# EAGLE board ArmBoardNew-New_Main_Board (EAGLE 8.6.0)
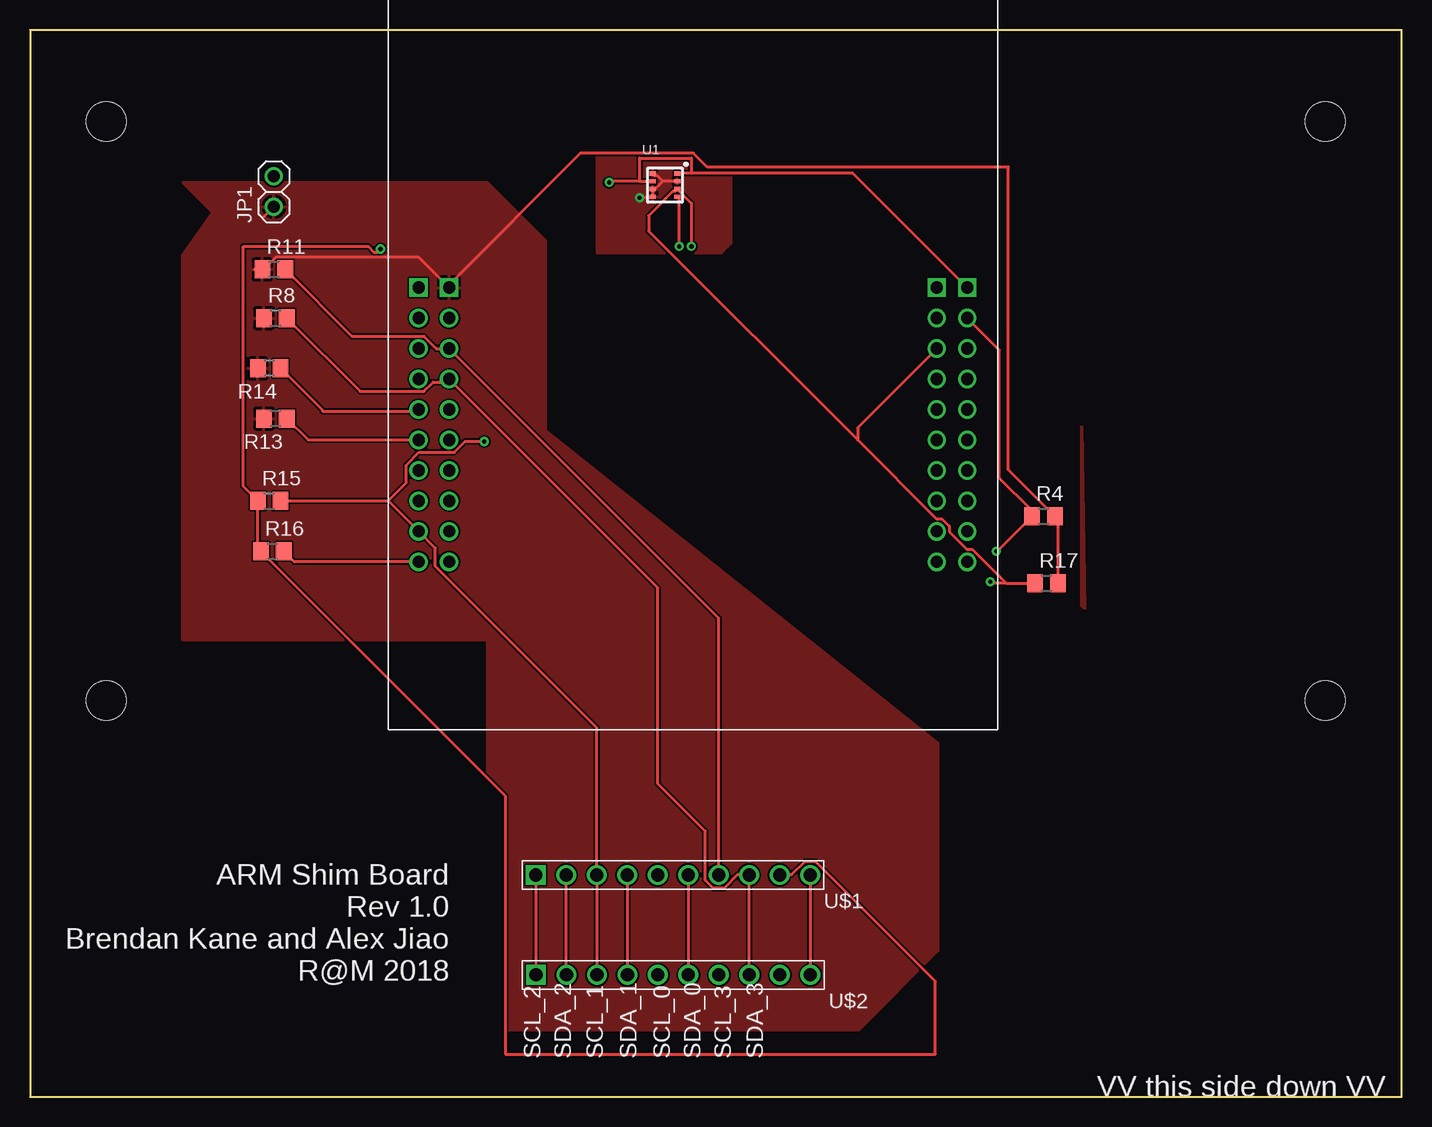
[diagram p0: board, top side]
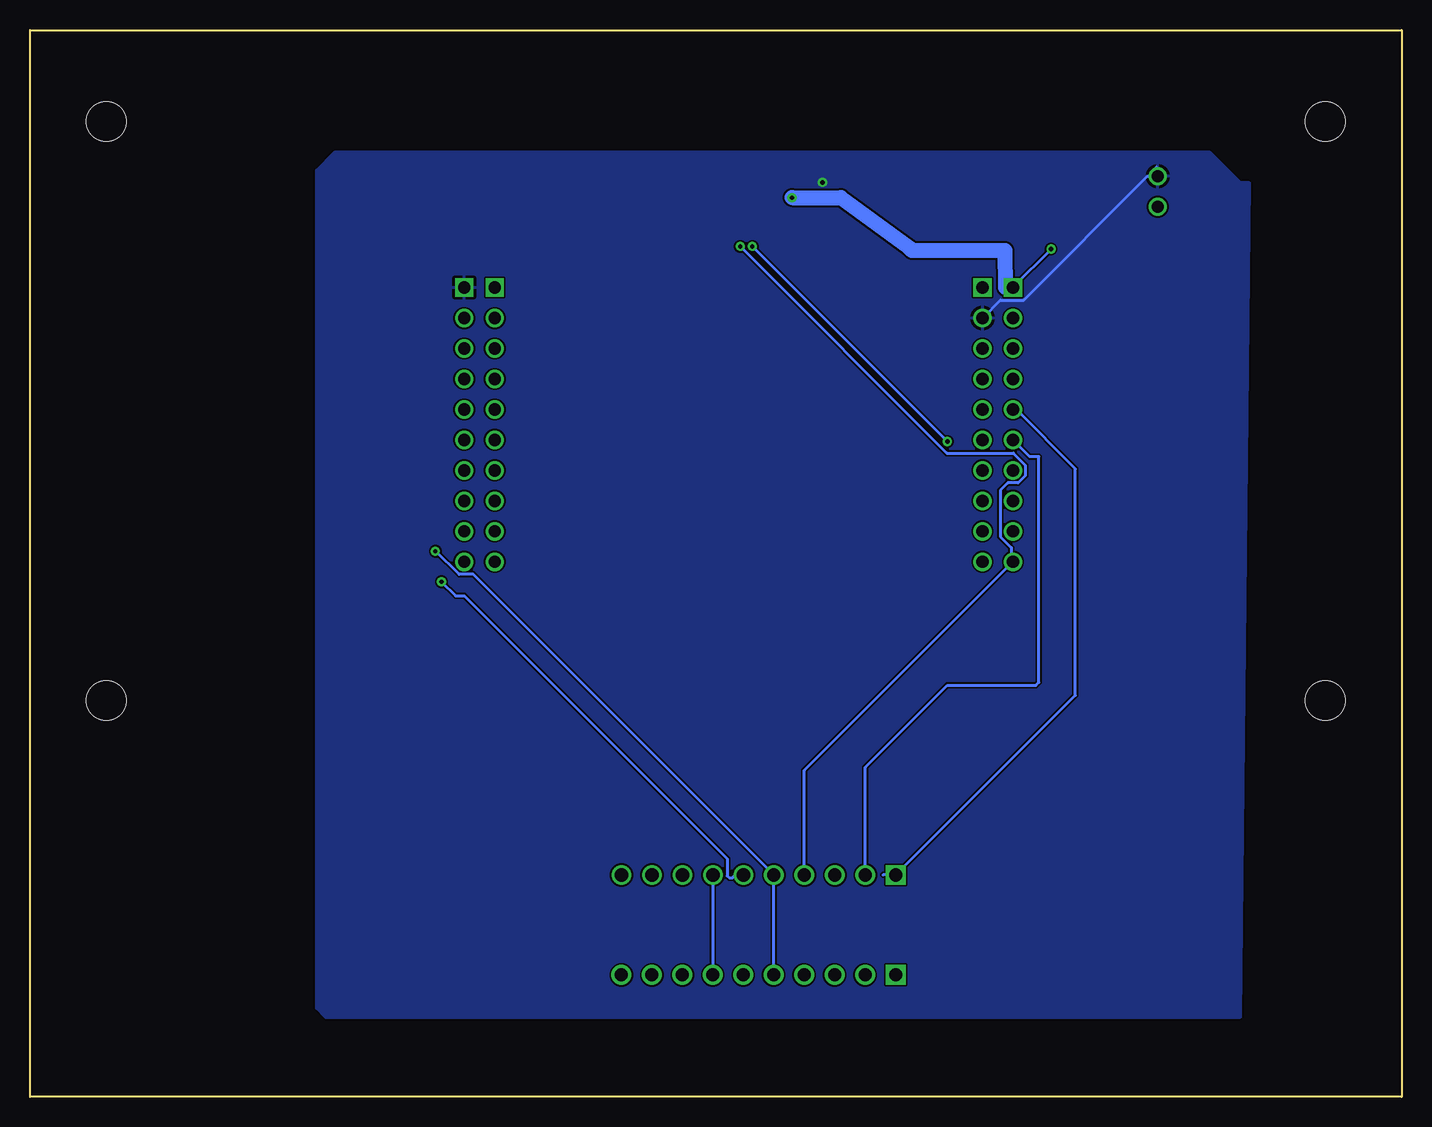
[diagram p1: board, bottom side, seen from below]

Size 114.3 x 88.9 mm. Coordinates in mm from the lower left corner, seen from the top.
Outline: 0,88.9 0,0 114.3,0 114.3,88.9 0,88.9
Copper layers (1*16): Top 0.035mm / dielectric 1.5mm / Bottom 0.035mm
Design rules "default": minimum track width 6mil, minimum drill 0.35mm, track to track 6mil, track to pad 6mil, pad to pad 6mil, via to via 6mil, smd to smd 6mil, copper to edge 40mil, drill to drill 6mil, minimum pad ring 10mil, minimum via ring 8mil, stop-mask expansion 4mil, vias tented up to drill 0mil, thermal gap 10mil
Holes 3.3 mm at 6.35,81.28 6.35,33.02 107.95,33.02 107.95,81.28

## Footprints (pad centres in the part's own frame; a part is rotated, then mirrored left to right if it is on the bottom)
1X02 = drill 1.016: 1 -1.27,0; 2 1.27,0
R0805 = smd 1.3 x 1.5: 1 -0.95,0; 2 0.95,0
BME280_LGA = smd 0.5 x 0.35: P$1 1.025,0.975; P$2 1.025,0.325; P$3 1.025,-0.325; P$4 1.025,-0.975; P$5 -1.025,-0.975; P$6 -1.025,-0.325; P$7 -1.025,0.325; P$8 -1.025,0.975
KK254_10-PIN = drill 1.1 square: P$1 11.43,0 | drill 1.1: P$2 8.89,0; P$3 6.35,0; P$4 3.81,0; P$5 1.27,0; P$6 -1.27,0; P$7 -3.81,0; P$8 -6.35,0; P$9 -8.89,0; P$10 -11.43,0
TIVA-C_EVAL = drill 1.016 square: 1-1 -22.86,3.81; 2-1 22.86,3.81; 3-1 -20.32,3.81; 4-1 20.32,3.81 | drill 1.016: 1-2 -22.86,1.27; 1-3 -22.86,-1.27; 1-4 -22.86,-3.81; 1-5 -22.86,-6.35; 1-6 -22.86,-8.89; 1-7 -22.86,-11.43; 1-8 -22.86,-13.97; 1-9 -22.86,-16.51; 1-10 -22.86,-19.05; 2-2 22.86,1.27; 2-3 22.86,-1.27; 2-4 22.86,-3.81; 2-5 22.86,-6.35; 2-6 22.86,-8.89; 2-7 22.86,-11.43; 2-8 22.86,-13.97; 2-9 22.86,-16.51; 2-10 22.86,-19.05; 3-2 -20.32,1.27; 3-3 -20.32,-1.27; 3-4 -20.32,-3.81; 3-5 -20.32,-6.35; 3-6 -20.32,-8.89; 3-7 -20.32,-11.43; 3-8 -20.32,-13.97; 3-9 -20.32,-16.51; 3-10 -20.32,-19.05; 4-2 20.32,1.27; 4-3 20.32,-1.27; 4-4 20.32,-3.81; 4-5 20.32,-6.35; 4-6 20.32,-8.89; 4-7 20.32,-11.43; 4-8 20.32,-13.97; 4-9 20.32,-16.51; 4-10 20.32,-19.05

## Placement (x,y rotation side)
JP1  [1X02]  20.32,75.44 90 top
R4  5k  [R0805]  84.45,48.39 0 top
R8  5k  [R0805]  20.45,64.9 0 top
R11  5k  [R0805]  20.32,68.96 0 top
R13  5k  [R0805]  20.45,56.52 180 top
R14  5k  [R0805]  19.94,60.71 180 top
R15  5k  [R0805]  19.94,49.66 0 top
R16  5k  [R0805]  20.19,45.47 0 top
R17  5k  [R0805]  84.71,42.8 0 top
U1  BME280  [BME280_LGA]  52.91,75.97 0 top
U$1  KK254_10-PIN  [KK254_10-PIN]  53.58,18.49 180 top
U$2  KK254_10-PIN  [KK254_10-PIN]  53.59,10.16 180 top
U$3  TIVA-C_EVAL  [TIVA-C_EVAL]  55.24,63.63 0 top

## Library data of the parts
JP1 = pinhead
R4 R8 R11 R13-R17 = resistor
U1 = BME280ComponentLibrary; PROD_ID: IC-13090
U$1 U$2 = molex
U$3 = texas

## Nets
3.3V: R15.1 R16.1 U1.P$2 U1.P$5 U1.P$6 U1.P$8 U$1.P$9 U$3.1-1
5V: JP1.1 R4.2 R8.1 R11.1 R13.2 R14.2 R17.2 U$3.3-1
CS: U$3.4-2
CS_0: U$3.2-9
CS_2: U$3.1-2
DGND: JP1.2 U1.P$1 U1.P$7 U$3.2-1 U$3.3-2
MISO_0: U$3.2-8
MISO_1: U$3.2-4
MISO_2: U$3.2-7
MISO_3: U$3.3-5
MOSI_0: U$3.1-8
MOSI_1: U$3.3-10
MOSI_2: U$3.2-6
MOSI_3: U$3.3-6
N$9: U$2.P$9
N$10: U$1.P$10 U$2.P$10
PE2: U$3.3-8
PE3: U$3.3-9
PUSH1: U$3.4-10
RES: U$3.2-5
RX_CF: U$3.2-3
RX_MC: U$3.4-4
RX_MD: U$3.4-8
RX_MF: U$3.1-3
RX_SF: U$3.4-6
SCK_0: U$3.2-10
SCL_0: R4.1 U$1.P$5 U$2.P$5 U$3.2-2
SCL_1: R15.2 U1.P$4 U$1.P$3 U$2.P$3 U$3.1-9
SCL_2: R14.1 U$1.P$1 U$2.P$1 U$3.1-5
SCL_3: R11.2 U$1.P$7 U$2.P$7 U$3.3-3
SDA_0: R17.1 U$1.P$6 U$2.P$6 U$3.4-3
SDA_1: R16.2 U1.P$3 U$1.P$4 U$2.P$4 U$3.1-10
SDA_2: R13.1 U$1.P$2 U$2.P$2 U$3.1-6
SDA_3: R8.2 U$1.P$8 U$2.P$8 U$3.3-4
SPI_CLK: U$3.4-1
SPI_CLK_2: U$3.1-7
TX_CF: U$3.3-7
TX_MC: U$3.4-5
TX_MD: U$3.4-9
TX_MF: U$3.1-4
TX_SF: U$3.4-7

## Tracks (layer width: path | path; a pad name or v marks a point on that pad's centre or on a via)
3.3V  (via drill 0.35)
  Top 0.254: U1.P$5 51.82,74.93 | 51.82,74.93 v50.8,74.93 50.55,74.93 | U1.P$8 52.08,76.75 52.25,76.75 52.71,76.3 | U1.P$2 52.71,76.3 | 52.71,76.3 52.06,75.65 U1.P$6 U1.P$5 51.82,74.93 | U$1.P$9 63.45,18.49 64.55,19.59 65.47,19.59 75.44,9.62 75.44,3.56 39.62,3.56 39.62,25.09 R16.1 18.99,45.72 R15.1 17.78,50.87 17.78,70.87 28.19,70.87 28.66,70.4 28.96,70.4 v29.21,70.65
  Bottom 0.152: 33.08,67.44 33.01,67.44
  Bottom 0.254: v29.21,70.65 32.38,67.47 U$3.1-1
  Bottom 1.27: U$3.1-1 33.01,67.44 33.03,70.51 40.79,70.51 41.05,70.76 46.74,74.93 v50.8,74.93
  pour Top: 87.88,40.64 87.63,40.89 87.63,55.88
  pour Top: 47.24,75.95 47.24,70.36 57.66,70.36 58.17,70.87 58.42,71.12 58.42,78.49 57.66,79.25 47.24,79.25
5V
  Top 0.254: 18.99,57.02 R13.2 | 18.99,64.39 19.46,64.86 | 19.46,64.86 R8.1 | 19.37,64.96 19.46,64.86 | 34.8,67.56 32.37,69.99 20.5,69.99 19.48,68.96 R11.1 18.67,68.96 | 34.8,67.56 U$3.3-1 | 19.37,73.22 JP1.1 | 85.41,43.05 R17.2 85.66,48.13 R4.2 81.53,52.26 81.53,77.47 56.45,77.47 55.29,78.64 45.87,78.64 34.8,67.56
  pour Top: 12.7,70.1 12.7,38.1 38.1,38.1 38.1,5.84 38.35,5.59 69.09,5.59 75.69,12.19 75.69,29.46 17.02,76.2
  pour Top: 12.7,76.2 38.1,76.2 42.93,71.37 42.93,55.37 33.53,55.37
DGND  (via drill 0.35)
  Top 0.254: 50.8,76.3 U1.P$7 | 50.8,76.3 50.8,78.23 55.12,78.23 55.12,76.96 | 55.12,76.96 53.95,76.96 U1.P$1 | U$3.2-1 68.58,76.96 55.12,76.96 | 50.8,76.3 48.36,76.3 v48.26,76.2
  Bottom 0.254: U$3.3-2 33.43,66.4 31.51,66.4 21.2,76.71 JP1.2 20.43,77.47
  pour Bottom: 12.7,76.2 13.46,6.6 89.66,6.6 90.42,7.37 90.42,77.22 88.9,78.74 16,78.74 13.46,76.2
N$9
  Top 0.254: 62.47,10.18 U$2.P$9
N$10
  Top 0.254: U$1.P$10 65.01,10.18 U$2.P$10
SCL_0  (via drill 0.35)
  Top 0.254: v80.52,45.47 80.58,45.47 R4.1 83.5,48.83 80.77,51.56 80.77,62.23 U$3.2-2
  Bottom 0.254: U$2.P$5 52.32,18.53 52.31,18.54 U$1.P$5 77.36,43.54 78.54,43.54 80.47,45.47 v80.52,45.47
SCL_1  (via drill 0.35)
  Top 0.254: U$1.P$3 47.24,18.47 | U$1.P$3 47.23,10.18 U$2.P$3 | R15.2 29.84,49.66 | 29.84,49.66 U$3.1-9 33.78,45.72 33.78,44.2 47.24,30.73 47.23,30.72 U$1.P$3 | 29.84,49.66 31.34,51.16 31.34,52.63 32.41,53.7 35.36,53.7 36.27,54.61 v37.85,54.61 | v54.1,70.87 54.1,74.83 U1.P$4
  Bottom 0.254: v37.85,54.61 v54.1,70.87 54.36,70.87
SCL_2
  Top 0.254: 42.16,18.47 U$1.P$1 42.15,10.18 U$2.P$1 | R14.1 24.38,57.21 24.38,57.15 32.26,57.15 U$3.1-5
  Bottom 0.254: 43.2,18.49 U$1.P$1 27.18,33.46 27.18,52.32 32.13,57.28 U$3.1-5
SCL_3
  Top 0.254: 57.39,10.18 U$2.P$7 | U$1.P$7 57.39,39.89 U$3.3-3 33.86,62.36 32.82,63.4 26.83,63.4 R11.2
  Bottom 0.254: U$1.P$7 57.4,18.47 U$2.P$7
SDA_0  (via drill 0.35)
  Top 0.254: 53.74,75.45 53.57,75.45 51.56,73.44 51.56,72.14 68.96,54.74 | 68.96,54.74 75.54,48.16 76,48.16 76.61,47.55 76.61,47.09 78.08,45.62 | 78.08,45.62 78.11,45.59 | U$1.P$6 54.85,10.18 U$2.P$6 | 78.08,45.62 78.54,45.62 81.36,42.8 | 81.36,42.8 R17.1 | 81.36,42.8 80.14,42.8 v80.01,42.93 | U$3.4-3 68.96,55.75 68.96,54.74
  Bottom 0.254: U$1.P$6 55.52,18.49 55.78,18.24 56.03,18.24 56.21,18.42 56.21,19.85 78.11,41.74 78.83,41.74 v80.01,42.93 | 54.85,10.18 U$2.P$6
SDA_1  (via drill 0.35)
  Top 0.254: 49.77,10.94 49.78,10.92 U$2.P$4 49.78,9.91 49.77,9.92 U$1.P$4 | U$3.1-10 22.03,44.58 R16.2 | U1.P$3 55.12,74.47 v55.12,70.87
  Bottom 0.254: U$1.P$4 49.77,27.19 32.51,44.45 | 32.51,44.45 U$3.1-10 | v55.12,70.87 37.9,53.65 32.36,53.65 31.34,52.63 31.34,51.77 31.95,51.16 32.82,51.16 33.43,50.55 33.43,46.69 32.51,45.77 32.51,44.45
SDA_2
  Top 0.254: U$2.P$2 44.7,18.47 U$1.P$2 | R13.1 23.18,54.74 U$3.1-6
  Bottom 0.254: U$1.P$2 44.69,27.45 37.85,34.29 30.48,34.29 30.23,34.54 30.23,53.34 30.99,53.34 U$3.1-6
SDA_3
  Top 0.152: 59.93,10.18 U$2.P$8
  Top 0.254: 35.18,59.56 52.32,42.42 52.32,26.09 56.28,22.13 56.28,18.03 56.93,17.39 57.85,17.39 58.95,18.49 U$1.P$8 59.94,18.47 U$2.P$8 | 35.18,59.56 U$3.3-4 | 35.18,59.56 33.6,59.56 32.82,58.78 27.52,58.78 R8.2

## Text on the board
tPlace: ARM Shim Board / Rev 1.0 / Brendan Kane and Alex Jiao / R@M 2018 | SCL_2 | SDA_2 | SCL_1 | SDA_1 | SCL_0 | SDA_0 | SCL_3 | SDA_3
tValues: NC | NC
_tsilk: VV this side down VV